# Altium PCB PCB1.PcbDoc (part 1 of 3)
Units mm, origin at the board's own origin, x right, y up, seen from the top; angles counter-clockwise.
Board outline 130 x 100 mm, 2 copper layers (Top Layer, Bottom Layer), stack 1.571 mm thick; 286 components, 215 nets, 1030 pads, 857 vias.
Unrouted connection lines stored in the file: 4.
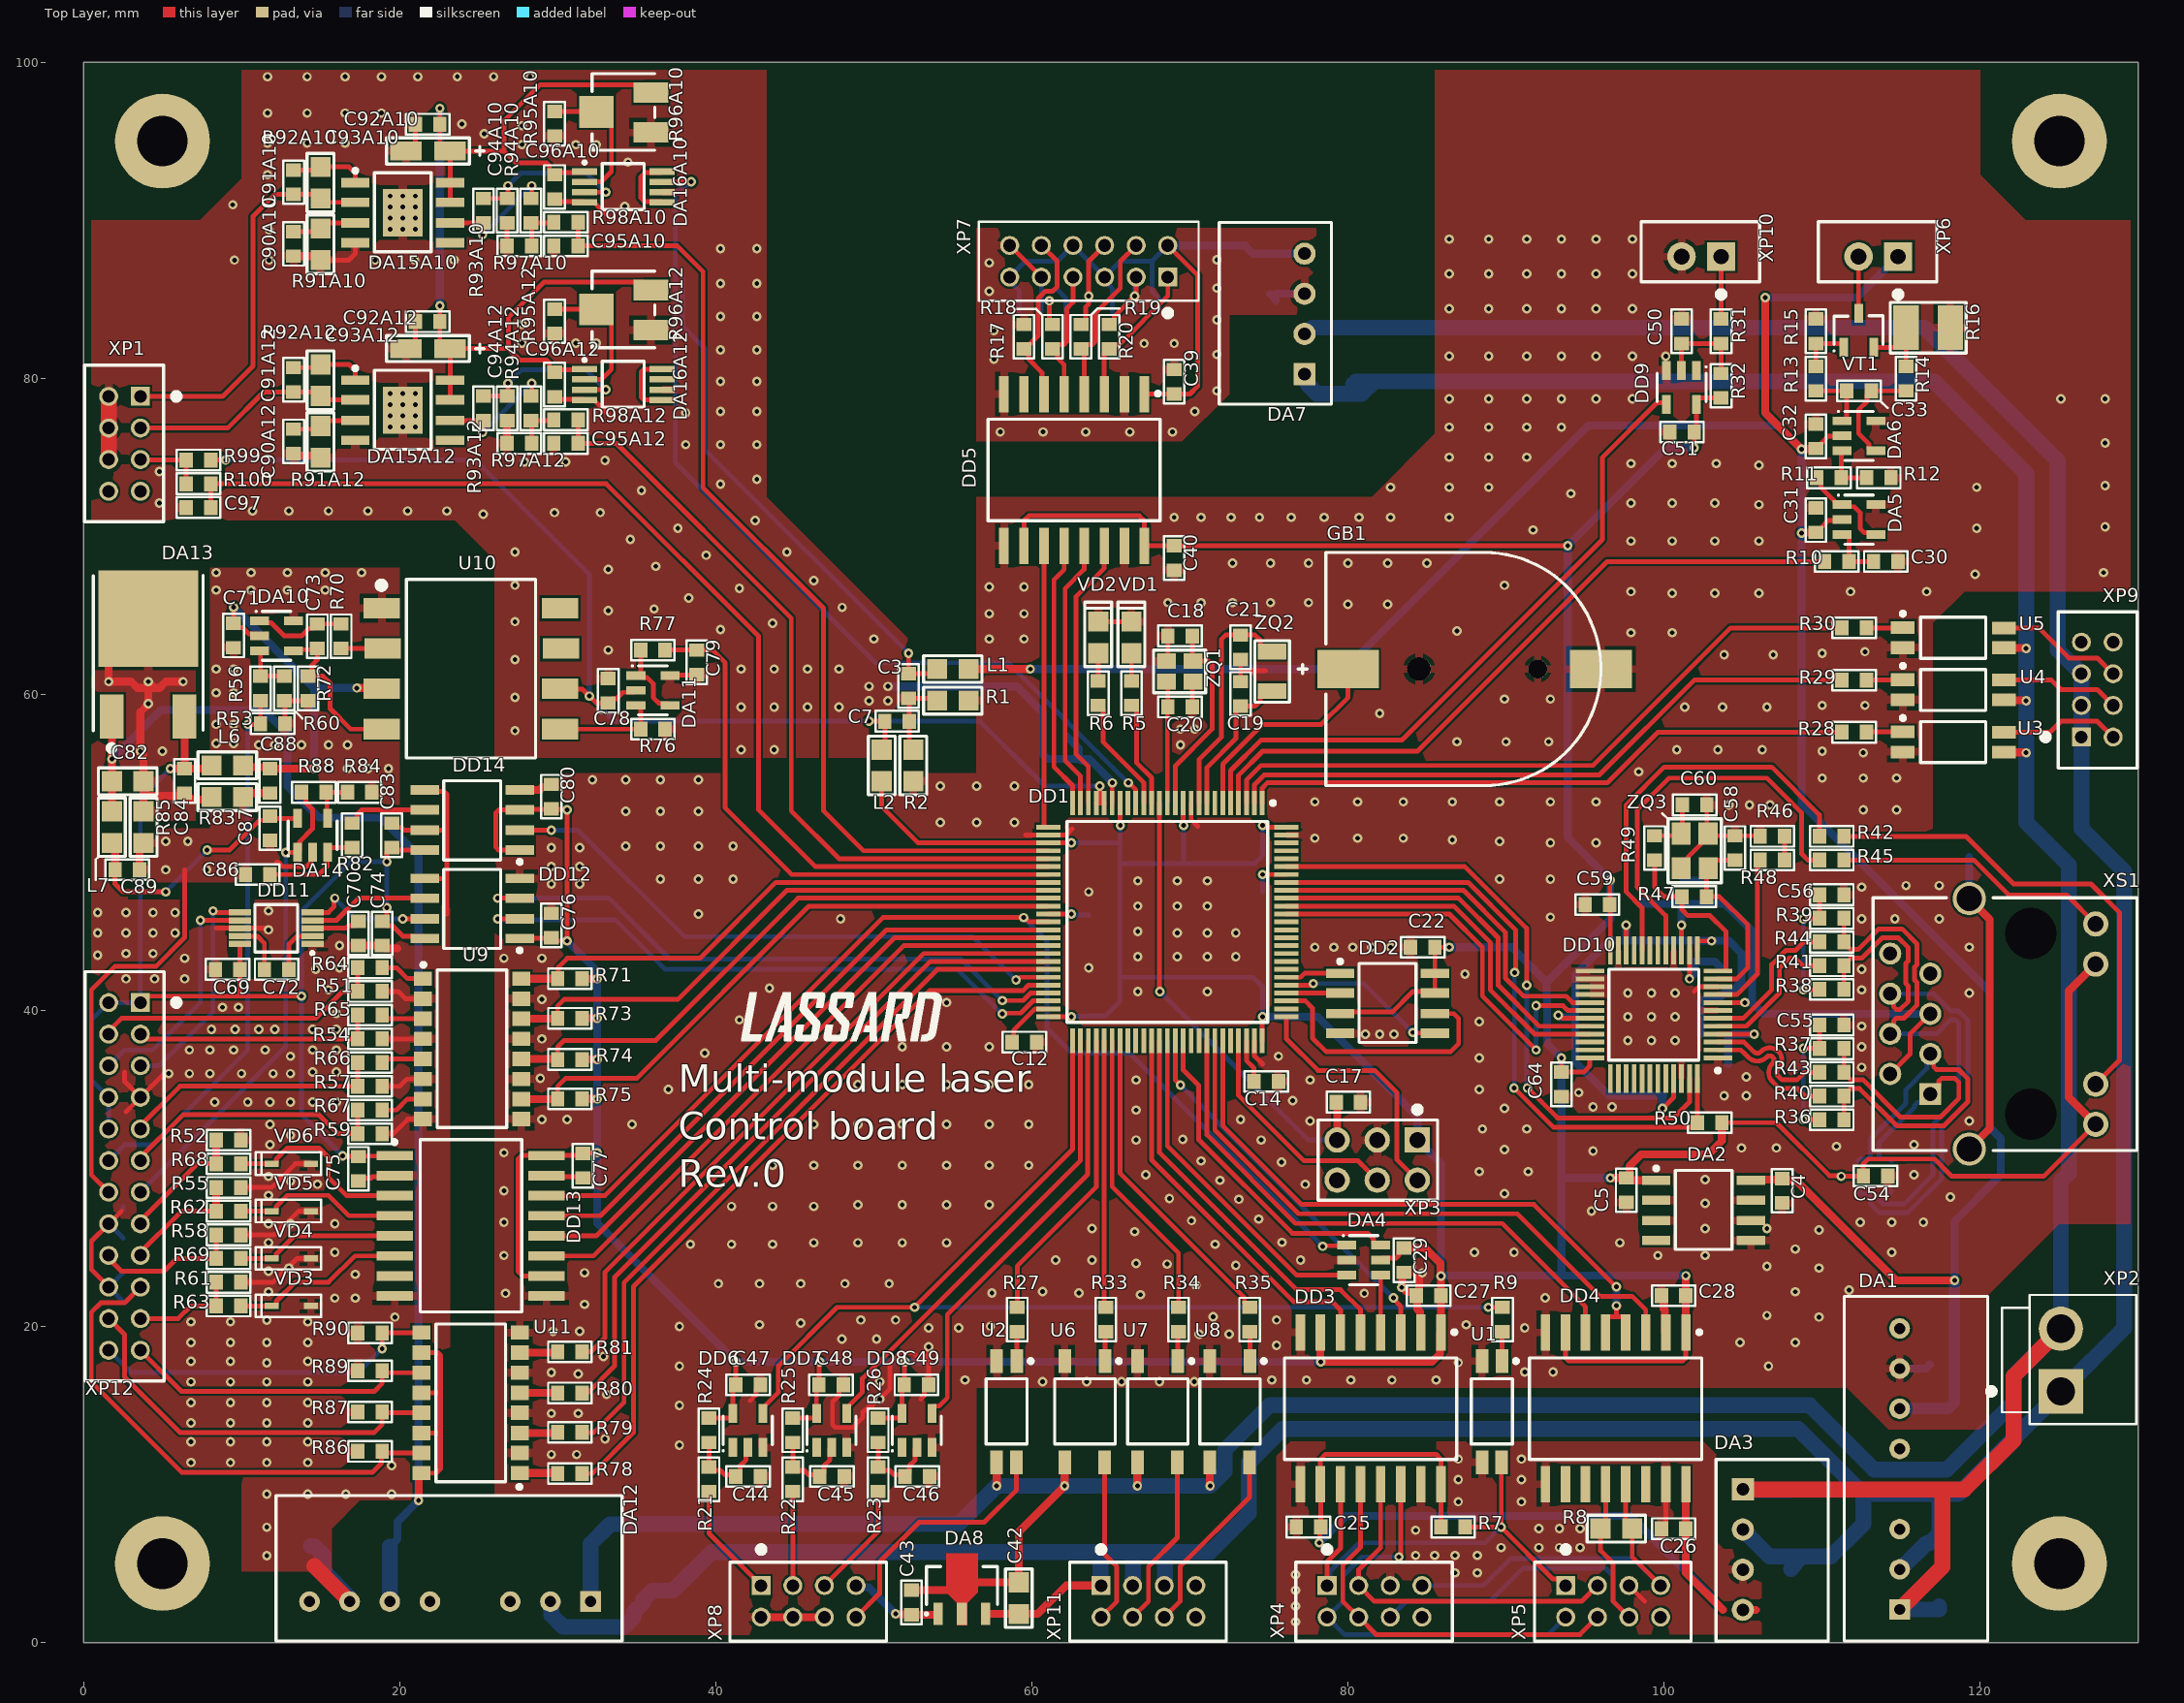
[diagram p0: Top Layer view]
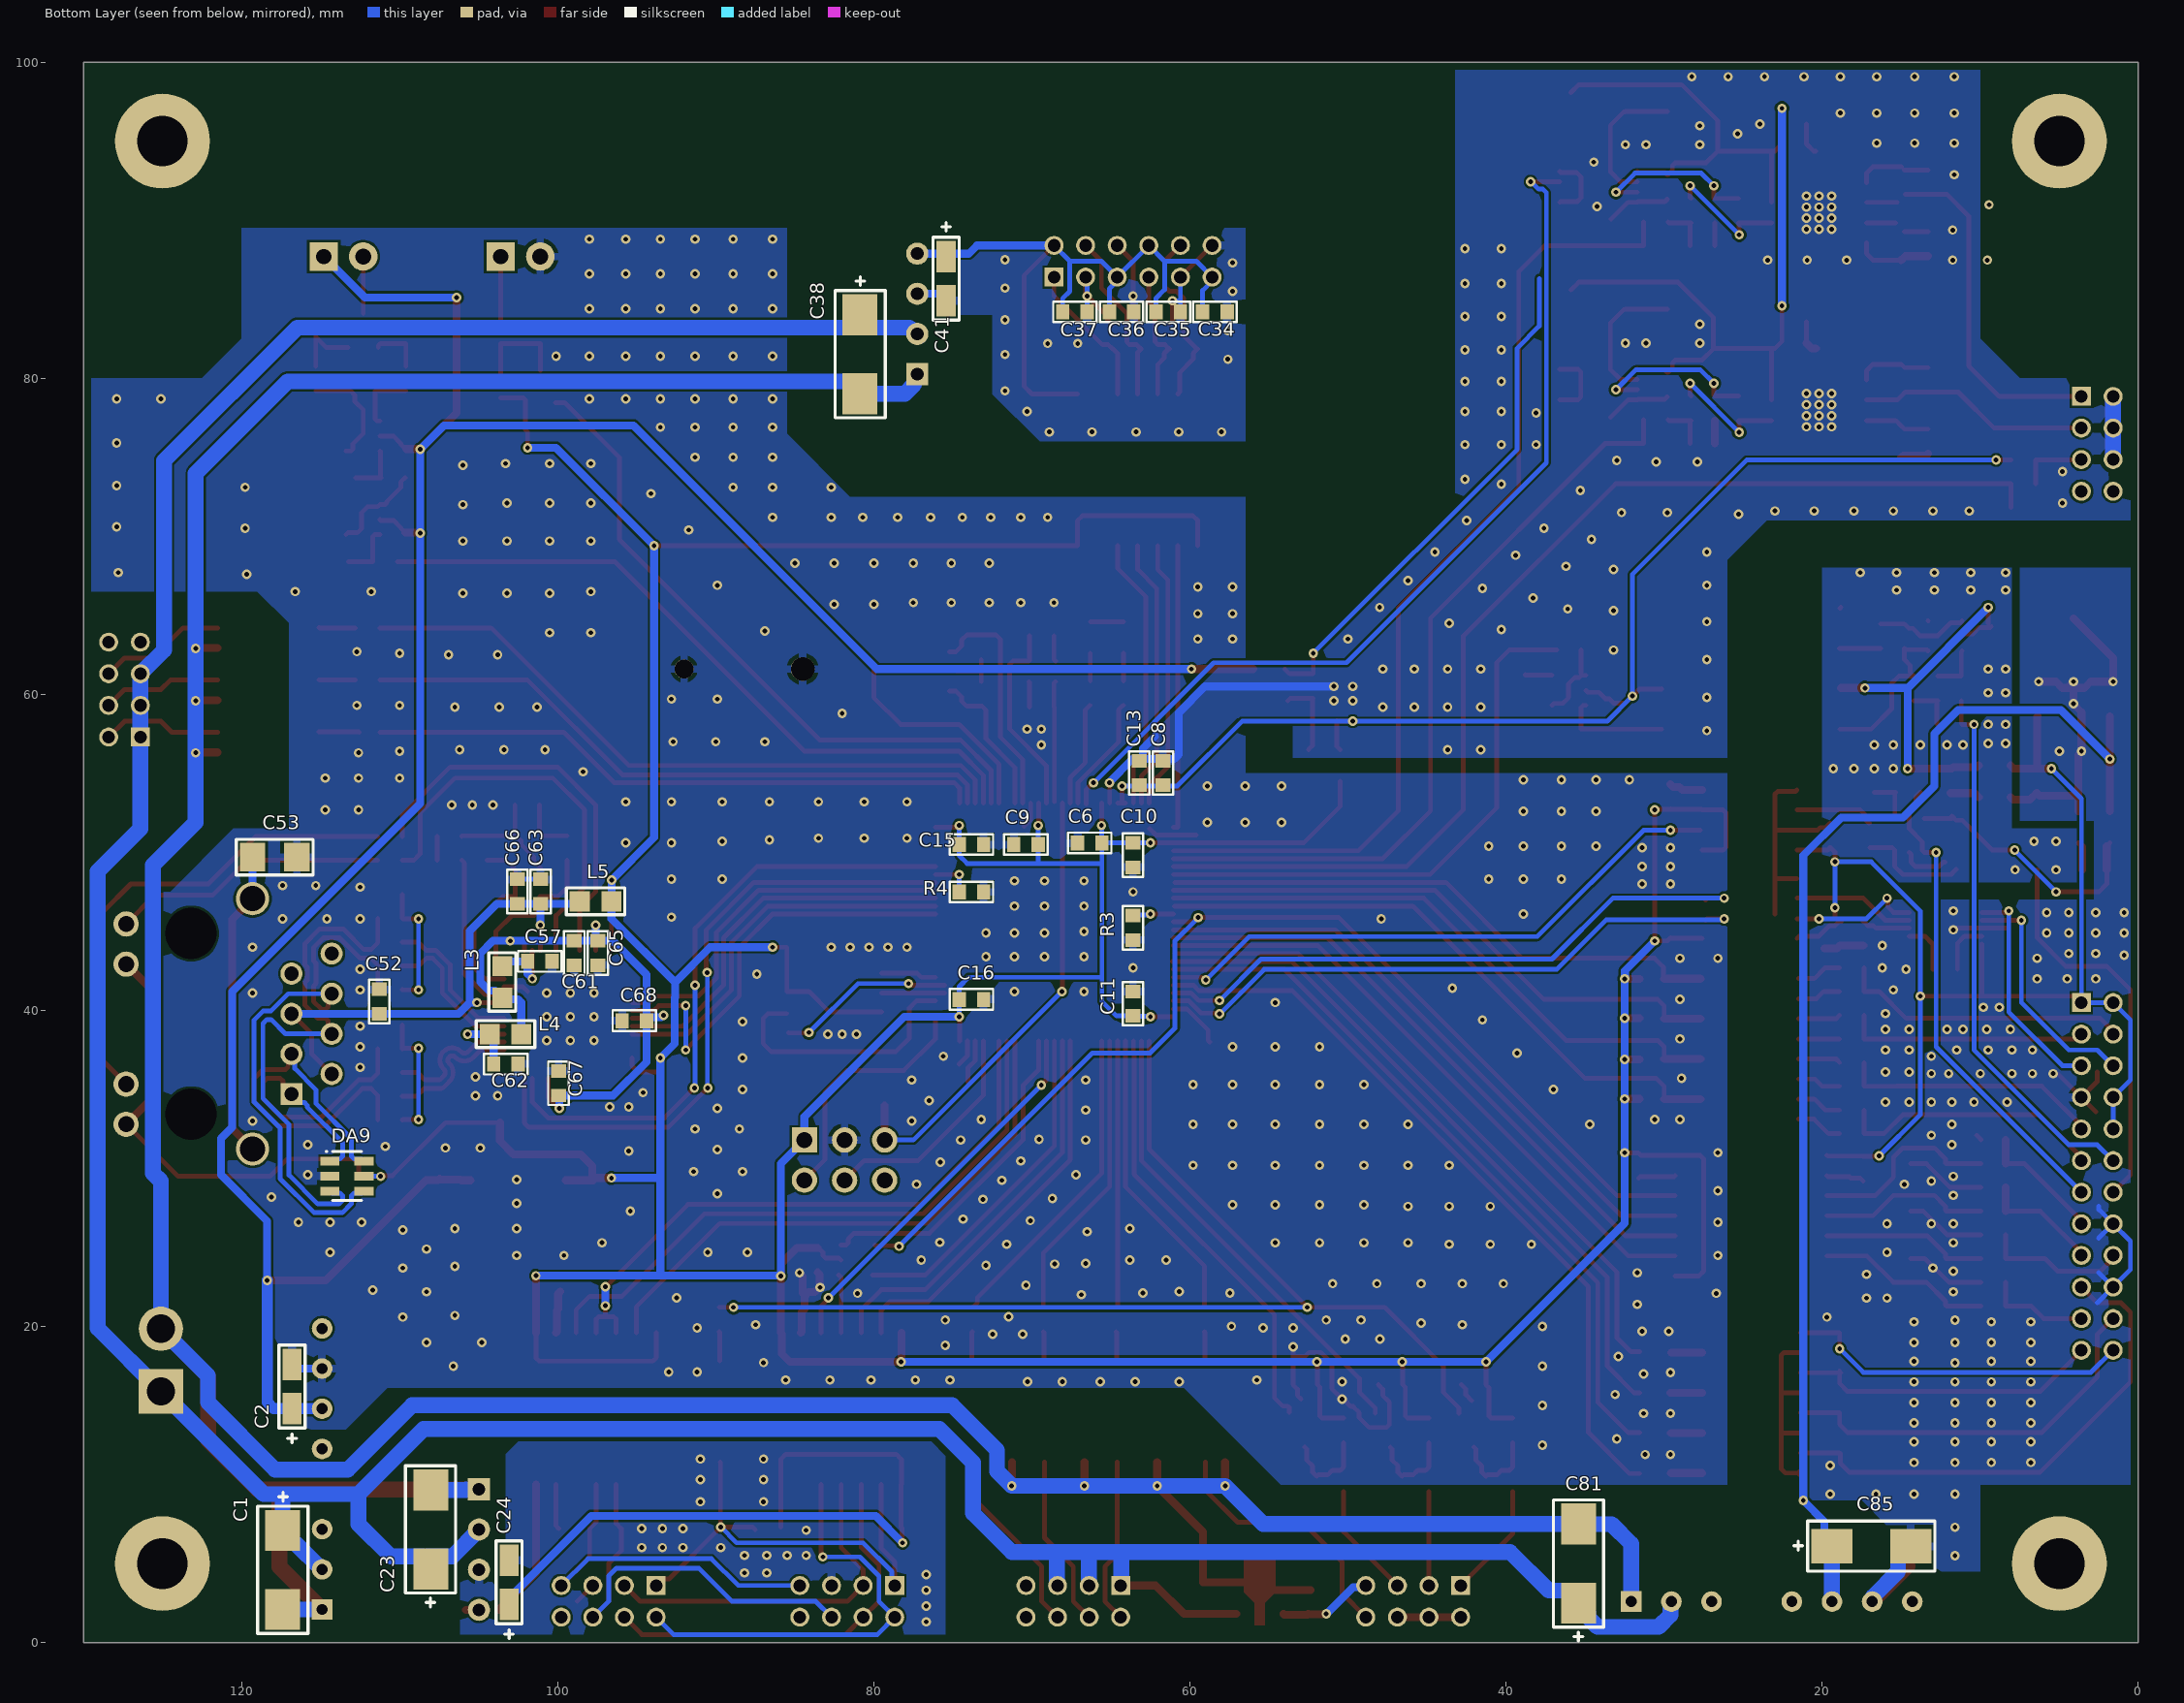
[diagram p1: Bottom Layer view, seen from below]
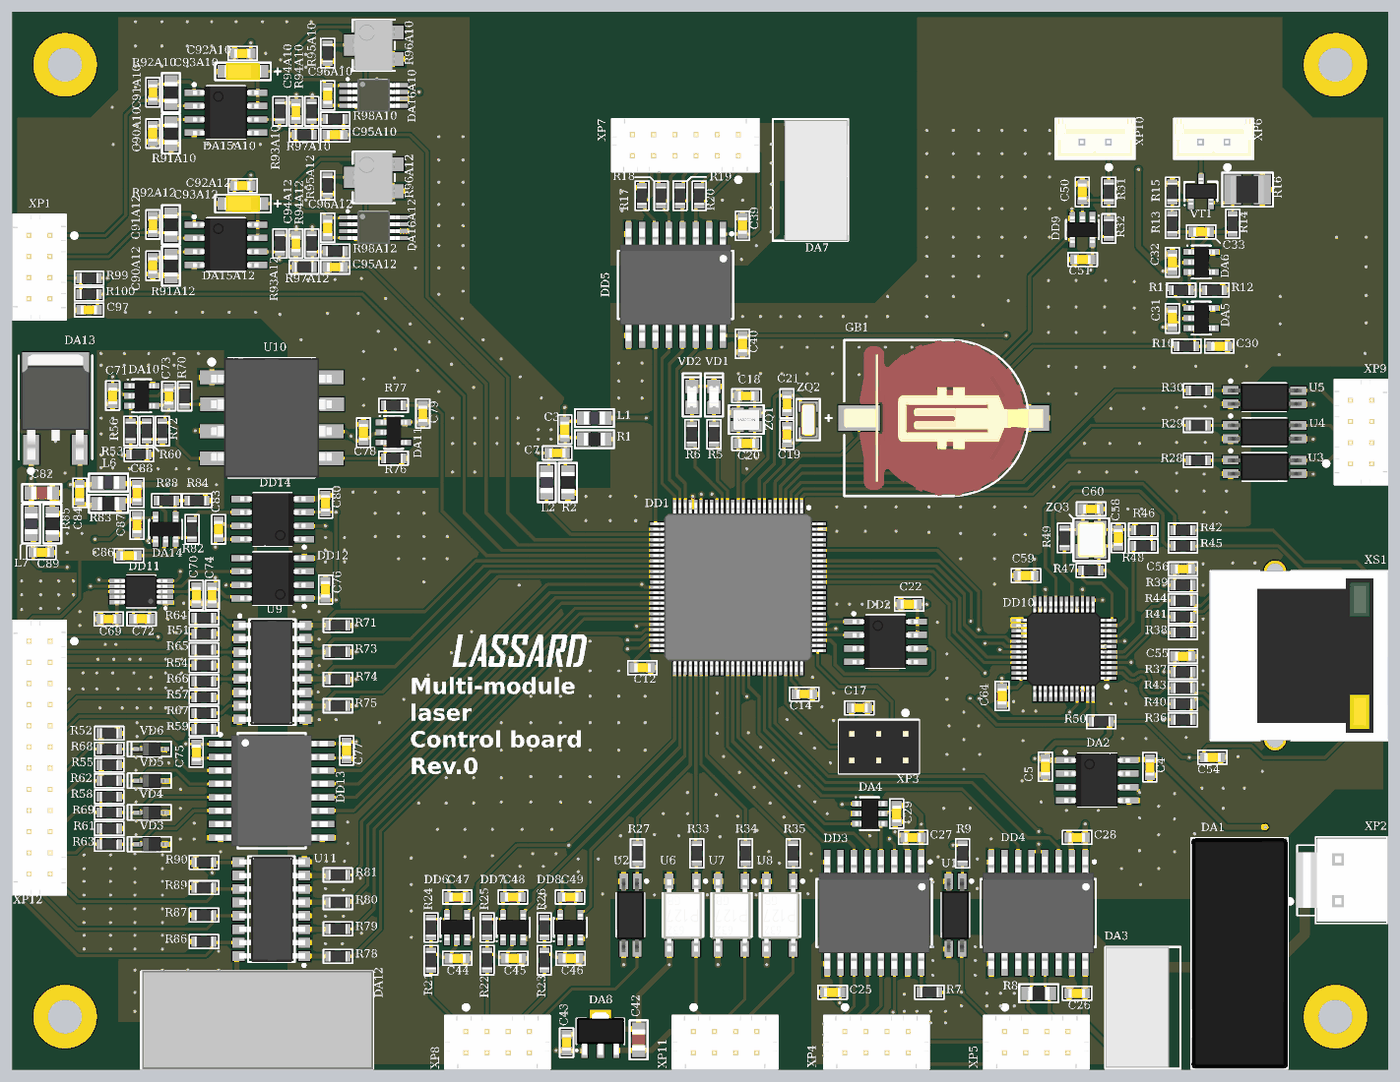
[diagram p4: 3D render of the assembled board from above, using the file's embedded part models]
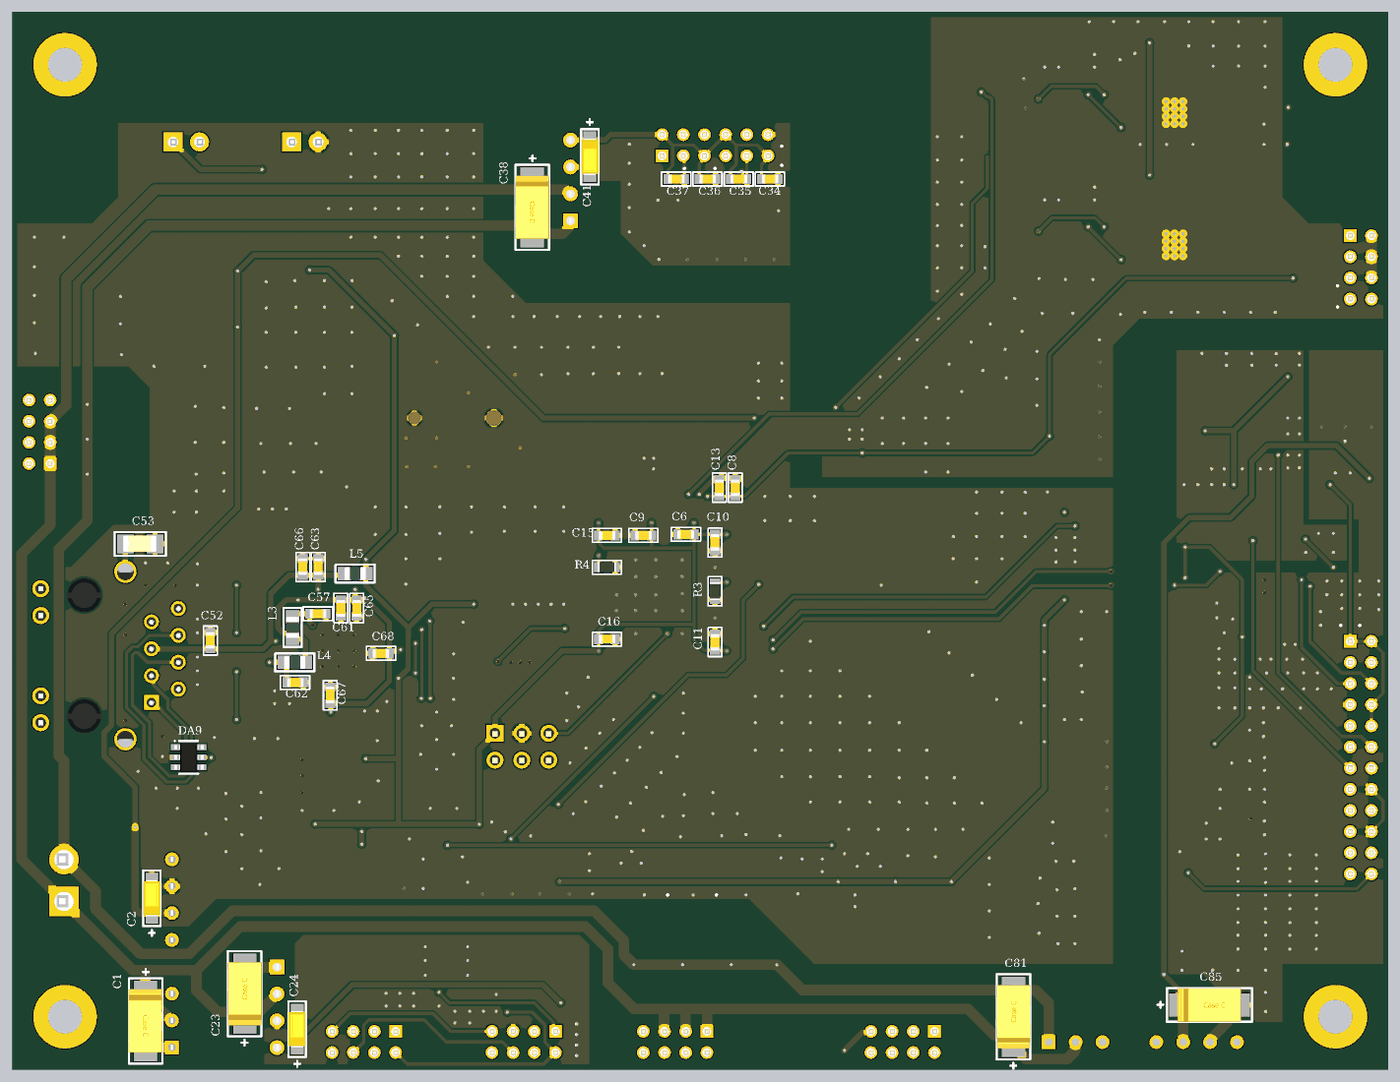
[diagram p5: 3D render of the assembled board from below, using the file's embedded part models]

## Layer stack, top to bottom
Top Solder: solder mask 0.0102, Solder Resist, Dk 3.5
Top Layer: signal copper 0.0356
Dielectric 1: dielectric 1.5, FR-4, Dk 4.8
Bottom Layer: signal copper 0.0356
Bottom Solder: solder mask 0.0102, Solder Resist, Dk 3.5

## Board outline
0,0 0,100 130,100 130,0

## Design rules (kind name [scope] priority, off if disabled: settings)
BoardOutlineClearance [(OnLayer('Bottom Layer') AND OnLayer('Top Layer'))] p1: gap=0.2 ignorepadtopadclearanceinfootprint=FALSE
Clearance [All] p1: gap=0.15 ignorepadtopadclearanceinfootprint=TRUE
DiffPairsRouting [All] p1: maxlimit=0.254 minlimit=0.2 mostfreqgap=0.254 toplayer_minwidth=0.3 toplayer_maxwidth=0.381 toplayer_prefwidth=0.381 bottomlayer_minwidth=0.3 bottomlayer_maxwidth=0.381 bottomlayer_prefwidth=0.381 maxuncoupledlength=12.7
Height [(OnLayer('Bottom Layer'))] p1: minheight=0 maxheight=3 prefheight=3
HoleSize [All] p1: absolutevalues=TRUE maxlimit=10 minlimit=0.2 maxpercent=80.000 minpercent=20.000
MinimumSolderMaskSliver [All] p1: minsoldermaskwidth=0.04
PlaneClearance [All] p1: clearance=0.5
PlaneConnect [All] p1: planeconnectstyle=Relief reliefexpansion=0.5 reliefentries=4 reliefconductorwidth=0.25 reliefairgap=0.25
PolygonConnect [All] p1: thpad.connectstyle=Relief thpad.reliefconductorwidth=0.5 thpad.reliefentries=4 thpad.polygonreliefangle="90 Angle" thpad.airgapwidth=0.25 smdpad.connectstyle=Relief smdpad.reliefconductorwidth=0.5 smdpad.reliefentries=4 smdpad.polygonreliefangle="90 Angle" smdpad.airgapwidth=0.25 via.connectstyle=Direct via.reliefconductorwidth=0.254 via.reliefentries=4 via.polygonreliefangle="90 Angle" via.airgapwidth=0.152
RoutingCorners [All] p1: cornerstyle=Round minsetback=0.254 maxsetback=2.54
RoutingVias [All] p1: holewidth=0.2 width=0.5 viastyle="Through Hole" minholewidth=0.2 minwidth=0.5 maxholewidth=1 maxwidth=1
SilkToSilkClearance [All] p1: silktosilkclearance=0.1
SilkToSolderMaskClearance [IsPad] p1: minsilkscreentomaskgap=0 clearancetoexposedcopper=TRUE
SolderMaskExpansion [All] p1: expansion=0.102 istentingtop=FALSE
Width [All] p1: maxlimit=1 minlimit=0.2 preferedwidth=0.3 minimp=50.000000 maximp=50.000000 favimp=50.000000
21 further rules are at their usual default settings.

## Classes and differential pairs
channel class Photodiode: A10 A12
component class A12: C90A12 C91A12 C92A12 C93A12 C94A12 C95A12 C96A12 DA15A12 DA16A12 R91A12 R92A12 R93A12 R94A12 R95A12 R96A12 R97A12 R98A12
component class A11: C97 R99 R100
component class A7: C50 C51 DD9 R31 R32 XP10
component class A9: C69 C70 C71 C72 C73 C74 C75 C76 C77 C78 C79 C80 C81 C82 C83 C84 C85 C86 C87 C88 C89 DA10 DA11 DA12 DA13 DA14 DD11 DD12 DD13 DD14 L6 L7 R51 R52 R53 R54 R55 R56 R57 R58 R59 R60 R61 R62 R63 R64 R65 R66 R67 R68 R69 R70 R71 R72 R73 R74 R75 R76 R77 R78 R79 R80 R81 R82 R83 R84 R85 R86 R87 R88 R89 R90 U9 U10 U11 VD3 VD4 VD5 VD6 XP12
component class A10: C90A10 C91A10 C92A10 C93A10 C94A10 C95A10 C96A10 DA15A10 DA16A10 R91A10 R92A10 R93A10 R94A10 R95A10 R96A10 R97A10 R98A10
differential pair class TD: TXO
differential pair class RD: RXI
component class Main: C1 C2 C3 C4 C5 C6 C7 C8 C9 C10 C11 C12 C13 C14 C15 C16 C17 C18 C19 C20 C21 C22 DA1 DA2 DD1 DD2 GB1 L1 L2 R1 R2 R3 R4 R5 R6 VD1 VD2 XP1 XP2 XP3 ZQ1 ZQ2
component class A8: C52 C53 C54 C55 C56 C57 C58 C59 C60 C61 C62 C63 C64 C65 C66 C67 C68 DA9 DD10 L3 L4 L5 R36 R37 R38 R39 R40 R41 R42 R43 R44 R45 R46 R47 R48 R49 R50 XS1 ZQ3
component class A1: C23 C24 C25 C26 C27 C28 C29 DA3 DA4 DD3 DD4 R7 R8 R9 U1 XP4 XP5
component class A6: R28 R29 R30 U3 U4 U5 XP9
component class A5: C30 C31 C32 C33 DA5 DA6 R10 R11 R12 R13 R14 R15 R16 VT1 XP6
component class A4: R33 R34 R35 U6 U7 U8 XP11
component class A3: C42 C43 C44 C45 C46 C47 C48 C49 DA8 DD6 DD7 DD8 R21 R22 R23 R24 R25 R26 R27 U2 XP8
component class A2: C34 C35 C36 C37 C38 C39 C40 C41 DA7 DD5 R17 R18 R19 R20 XP7
differential pair TXO: +TXO_P -TXO_N
differential pair TD: +TD_P -TD_N
differential pair RXI: +RXI_P -RXI_N
differential pair RD: +RD_P -RD_N

## Components (designator, comment, footprint, x,y, rotation, side; value= is the part's Value field where it differs from the comment)
C1 "10мкФх35B" CAP_C 117.4,7.1 r270 bottom
C2 "10мкФх10B" CAP_A 116.8,14.8 r90 bottom
C3 "0,1мкФ" CAP_0603 52.2,61.325 r270 top
C4 "0,1мкФ" CAP_0603 107.468,29.393 r270 top
C5 "2,2мкФ" CAP_0603 97.6,29.425 r270 top
C6 "0,1мкФ" CAP_0603 65.545,50.6 r0 bottom
C7 "0,1мкФ" CAP_0603 50.675,58.3 r0 top
C8 "0,1мкФ" CAP_0603 61.7,55.825 r270 bottom
C9 "0,1мкФ" CAP_0603 71.175,50.5 r180 bottom
C10 "0,1мкФ" CAP_0603 63.6,49.025 r90 bottom
C11 "0,1мкФ" CAP_0603 63.6,41.225 r270 bottom
C12 "2,2мкФ" CAP_0603 58.725,38 r0 top
C13 "0,1мкФ" CAP_0603 63.2,55.825 r270 bottom
C14 "2,2мкФ" CAP_0603 74.025,35.5 r0 top
C15 "0,1мкФ" CAP_0603 74.625,50.5 r180 bottom
C16 "0,1мкФ" CAP_0603 74.625,40.7 r180 bottom
C17 "0,1мкФ" CAP_0603 79.225,34.2 r0 top
C18 "8пФ" CAP_0603 70.175,63.7 r180 top
C19 "18пФ" CAP_0603 73.2,59.225 r90 top
C20 "8пФ" CAP_0603 68.575,59.2 r0 top
C21 "18пФ" CAP_0603 73.2,63.775 r270 top
C22 "0,1мкФ" CAP_0603 85.525,44 r180 top
C23 "10мкФх35B" CAP_C 108.025,4.665 r90 bottom
C24 "10мкФх10B" CAP_A 103.075,2.415 r90 bottom
C25 "0,1мкФ" CAP_0603 78.3,7.315 r180 top
C26 "0,1мкФ" CAP_0603 101.4,7.215 r180 top
C27 "0,1мкФ" CAP_0603 85.9,21.95 r180 top
C28 "0,1мкФ" CAP_0603 101.4,21.95 r180 top
C29 "0,1мкФ" CAP_0603 83.55,25 r270 top
C30 "1мкФ" CAP_0603 113.225,68.4 r0 top
C31 "0,1мкФ" CAP_0603 109.6,70.225 r90 top
C32 "0,1мкФ" CAP_0603 109.6,75.525 r90 top
C33 "100пФ" CAP_0603 111.525,79.2 r0 top
C34 "0,1мкФ" CAP_0603 59.225,84.2 r180 bottom
C35 "0,1мкФ" CAP_0603 62.175,84.2 r180 bottom
C36 "0,1мкФ" CAP_0603 65.125,84.2 r180 bottom
C37 "0,1мкФ" CAP_0603 68.075,84.2 r180 bottom
C38 "10мкФх35B" CAP_C 80.875,84.025 r270 bottom
C39 "0,1мкФ" CAP_0603 69,78.975 r90 top
C40 "0,1мкФ" CAP_0603 69,69.425 r270 top
C41 "10мкФх10B" CAP_A 75.425,87.7 r270 bottom
C42 "0,33мкФ" CAP_0805 59.175,3.815 r270 top
C43 "0,1мкФ" CAP_0603 52.375,1.74 r90 top
C44 "1мкФ" CAP_0603 41.25,10.515 r0 top
C45 "1мкФ" CAP_0603 46.55,10.515 r0 top
C46 "1мкФ" CAP_0603 51.95,10.515 r0 top
C47 "0,1мкФ" CAP_0603 41.25,16.315 r0 top
C48 "0,1мкФ" CAP_0603 46.5,16.315 r0 top
C49 "0,1мкФ" CAP_0603 51.9,16.315 r0 top
C50 "1мкФ" CAP_0603 101.1,82.175 r90 top
C51 "0,1мкФ" CAP_0603 101.925,76.6 r180 top
C52 "0,1мкФ" CAP_0603 111.279,39.762 r90 bottom
C53 "1нФх2кВ" CAP_1206 119.3,49.7 r180 bottom
C54 "0,1мкФ" CAP_0603 112.575,29.525 r0 top
C55 "0,1мкФ" CAP_0603 109.8,39.078 r0 top
C56 "0,1мкФ" CAP_0603 109.8,47.325 r0 top
C57 "0,1мкФ" CAP_0603 101.925,43.1 r180 bottom
C58 "8пФ" CAP_0603 104.475,49.475 r90 top
C59 "0,1мкФ" CAP_0603 96.575,46.7 r180 top
C60 "8пФ" CAP_0603 101.125,53 r0 top
C61 "0,1мкФ" CAP_0603 98.95,44.435 r270 bottom
C62 "0,1мкФ" CAP_0603 104.075,36.6 r180 bottom
C63 "0,1мкФ" CAP_0603 101.075,46.725 r90 bottom
C64 "0,1мкФ" CAP_0603 93.5,36.125 r270 top
C65 "0,1мкФ" CAP_0603 97.45,44.435 r270 bottom
C66 "0,1мкФ" CAP_0603 102.542,46.725 r90 bottom
C67 "0,1мкФ" CAP_0603 99.95,34.595 r90 bottom
C68 "0,1мкФ" CAP_0603 94.345,39.35 r0 bottom
C69 "0,1мкФ" CAP_0603 9.925,42.6 r180 top
C70 "0,1мкФ" CAP_0603 17.401,45.676 r270 top
C71 "0,1мкФ" CAP_0603 9.5,64.525 r270 top
C72 "0,1мкФ" CAP_0603 11.425,42.6 r0 top
C73 "100пФ" CAP_0603 14.8,64.475 r270 top
C74 "0,1мкФ" CAP_0603 18.9,45.675 r270 top
C75 "0,1мкФ" CAP_0603 17.4,30.775 r270 top
C76 "0,1мкФ" CAP_0603 29.6,44.575 r90 top
C77 "0,1мкФ" CAP_0603 31.6,30.975 r270 top
C78 "0,1мкФ" CAP_0603 33.2,59.425 r90 top
C79 "0,1мкФ" CAP_0603 38.8,62.825 r270 top
C80 "0,1мкФ" CAP_0603 29.6,52.725 r90 top
C81 "10мкФх35B" CAP_C 35.4,2.5 r90 bottom
C82 "0,33мкФ" CAP_0805 3.8,54.5 r180 top
C83 "0,1мкФ" CAP_0603 19.5,50.275 r90 top
C84 "0,1мкФ" CAP_0603 6.4,55.325 r270 top
C85 "10мкФх35B" CAP_C 19.4,6.1 r180 bottom
C86 "1мкФ" CAP_0603 11.825,48.6 r180 top
C87 "0,1мкФ" CAP_0603 11.8,52.325 r270 top
C88 "0,1мкФ" CAP_0603 11.8,55.325 r270 top
C89 "0,1мкФ" CAP_0603 1.975,48.9 r0 top
C90A10 "0,1мкФ" CAP_0603 13.3,87.7 r90 top (schematic designator C90)
C90A12 "0,1мкФ" CAP_0603 13.3,75.2 r90 top (schematic designator C90)
C91A10 "10пФ" CAP_0603 13.3,93.2 r270 top (schematic designator C91)
C91A12 "10пФ" CAP_0603 13.3,80.7 r270 top (schematic designator C91)
C92A10 "0,1мкФ" CAP_0603 22.575,96.075 r180 top (schematic designator C92)
C92A12 "0,1мкФ" CAP_0603 22.575,83.575 r180 top (schematic designator C92)
C93A10 "10мкФх10B" CAP_A 23.2,94.375 r180 top (schematic designator C93)
C93A12 "10мкФх10B" CAP_A 23.2,81.875 r180 top (schematic designator C93)
C94A10 "10пФ" CAP_0603 26.8,91.4 r270 top (schematic designator C94)
C94A12 "10пФ" CAP_0603 26.8,78.9 r270 top (schematic designator C94)
C95A10 "0,1мкФ" CAP_0603 31.325,88.375 r180 top (schematic designator C95)
C95A12 "0,1мкФ" CAP_0603 31.325,75.875 r180 top (schematic designator C95)
C96A10 "0,1мкФ" CAP_0603 29.8,92.9 r270 top (schematic designator C96)
C96A12 "0,1мкФ" CAP_0603 29.8,80.4 r270 top (schematic designator C96)
C97 "0,1мкФ" CAP_0603 8.075,71.825 r180 top
DA1 "TMR 3-2411" "TMR3 (SIP-8)" 114.9,2.1 r90 top
DA2 "KF33BD-TR" SOIC-8 99.5,29.25 r0 top
DA3 "TME 2405S" "TME (SIP-4)" 104.975,9.695 r270 top
DA4 "SN74LVC1G3157DBV" SOT-23-6 79.925,25.15 r0 top
DA5 "LMC7101BIM5" SOT-23-5 111.25,72 r0 top
DA6 "LMC7101BIM5" SOT-23-5 111.25,77.3 r0 top
DA7 "TME 2405S" "TME (SIP-4)" 77.25,80.26 r90 top
DA8 "L78L12ABUTR" SOT-89 54.075,1.815 r0 top
DA9 "TPD4S009DBVR" SOT-23-6 114.4,30.475 r180 bottom
DA10 "LMC7101BIM5" SOT-23-5 11.15,64.65 r0 top
DA11 "LMC7101BIM5" SOT-23-5 34.95,61.2 r0 top
DA12 "TMR 4-2415" "TMR4 (SIP-8)" 32.08,2.6 r180 top
DA13 "L78M05CDT-TR" TO-252 1.8,58.6 r0 top
DA14 "LM7301IM5X/NOPB" SOT-23-5 13.55,50 r90 top
DA15A10 "ADA4817-1ARDZ" "SOIC-8 EPAD" 17.2,92.375 r0 top (schematic designator DA15)
DA15A12 "ADA4817-1ARDZ" "SOIC-8 EPAD" 17.2,79.875 r0 top (schematic designator DA15)
DA16A10 "AD8611ARM-REEL" MSOP-8 31.7,93.075 r0 top (schematic designator DA16)
DA16A12 "AD8611ARM-REEL" MSOP-8 31.7,80.575 r0 top (schematic designator DA16)
DD1 "STM32F405VGT6" LQFP-100 74.6,53.125 r270 top
DD2 "W25Q16JVSNIQ" SOIC-8 79.5,42.35 r0 top
DD3 "ADUM1401CRW" SOIC-16W 85.875,19.615 r270 top
DD4 "ADM2483BRW" SOIC-16W 101.375,19.615 r270 top
DD5 "ADUM1400CRW" SOIC-16W 67.12,79 r270 top
DD6 "SN74LVC1G17DBV" SOT-23-5 41.075,12.365 r90 top
DD7 "SN74LVC1G17DBV" SOT-23-5 46.375,12.365 r90 top
DD8 "SN74LVC1G17DBV" SOT-23-5 51.775,12.365 r90 top
DD9 "SN74LVC1G17DBV" SOT-23-5 102.05,80.5 r270 top
DD10 "W5100S-L" LQFP-48 103.4,37 r180 top
DD11 "ADM101EARM" MSOP-10 14.475,44.2 r180 top
DD12 "ADUM1201CR" SOIC-8 27.6,44.55 r180 top
DD13 "ADUM1400CRW" SOIC-16W 19.7,30.82 r0 top
DD14 "ADUM1100BR" SOIC-8 27.6,50.15 r180 top
GB1 "DS1092-12-N8S" DS1092-12-N8S 96,61.6 r180 top
L1 "BLM21PG221SN1D" IND_0805 56,61.6 r180 top
L2 "BLM21PG221SN1D" IND_0805 50.5,54.5 r90 top
L3 "BLM21PG221SN1D" IND_0805 103.5,42.8 r270 bottom
L4 "BLM21PG221SN1D" IND_0805 102.3,38.5 r0 bottom
L5 "BLM21PG221SN1D" IND_0805 96.6,46.9 r0 bottom
L6 "BLM21PG221SN1D" IND_0805 8.1,55.5 r0 top
L7 "BLM21PG221SN1D" IND_0805 1.8,52.6 r270 top
R1 "0" RES_0805 56,59.6 r180 top
R2 "0" RES_0805 52.5,54.5 r90 top
R3 "10к" RES_0603 63.6,46.025 r270 bottom
R4 "10к" RES_0603 74.625,47.5 r180 bottom
R5 "200" RES_0603 66.3,59.275 r90 top
R6 "200" RES_0603 64.2,59.275 r90 top
R7 "10к" RES_0603 85.85,7.315 r0 top
R8 "120" RES_0805 95.975,7.215 r0 top
R9 "200" RES_0603 89.775,21.24 r270 top
R10 "10к" RES_0603 110.125,68.4 r0 top
R11 "12к" RES_0603 109.625,73.7 r0 top
R12 "10к" RES_0603 112.775,73.7 r0 top
R13 "200" RES_0603 109.6,79.175 r90 top
R14 "10к" RES_0603 115.3,79.175 r90 top
R15 "10к" RES_0603 109.6,83.775 r270 top
R16 "10" RES_1210 118.075,83.225 r180 top
R17 "10к" RES_0603 59.5,81.825 r90 top
R18 "10к" RES_0603 61.3,81.825 r90 top
R19 "10к" RES_0603 63.1,81.825 r90 top
R20 "10к" RES_0603 64.9,81.825 r90 top
R21 "1к" RES_0603 39.575,9.54 r90 top
R22 "1к" RES_0603 44.875,9.54 r90 top
R23 "1к" RES_0603 50.275,9.54 r90 top
R24 "10к" RES_0603 39.575,12.64 r90 top
R25 "10к" RES_0603 44.875,12.64 r90 top
R26 "10к" RES_0603 50.275,12.64 r90 top
R27 "200" RES_0603 59.075,19.64 r90 top
R28 "200" RES_0603 112.825,57.6 r180 top
R29 "200" RES_0603 112.825,60.9 r180 top
R30 "200" RES_0603 112.825,64.2 r180 top
R31 "1к" RES_0603 103.6,83.775 r270 top
R32 "10к" RES_0603 103.6,80.325 r270 top
R33 "200" RES_0603 64.675,19.64 r90 top
R34 "200" RES_0603 69.275,19.64 r90 top
R35 "200" RES_0603 73.775,19.64 r90 top
R36 "49,9" RES_0603 111.4,33.078 r180 top
R37 "49,9" RES_0603 111.4,37.578 r180 top
R38 "49,9" RES_0603 111.4,41.325 r180 top
R39 "49,9" RES_0603 111.4,45.825 r180 top
R40 "3,3" RES_0603 109.8,34.577 r0 top
R41 "3,3" RES_0603 109.8,42.825 r0 top
R42 "1к" RES_0603 111.4,51.012 r180 top
R43 "3,3" RES_0603 109.8,36.078 r0 top
R44 "3,3" RES_0603 109.8,44.325 r0 top
R45 "1к" RES_0603 111.4,49.512 r180 top
R46 "300" RES_0603 106.05,51.012 r0 top
R47 "1М" RES_0603 102.7,47.2 r180 top
R48 "12к" RES_0603 107.65,49.512 r180 top
R49 "0" RES_0603 99.4,49.475 r90 top
R50 "10к" RES_0603 102.075,32.9 r0 top
R51 "10к" RES_0603 18.925,41.2 r180 top
R52 "10к" RES_0603 9.975,31.8 r180 top
R53 "10к" RES_0603 11.175,58.15 r0 top
R54 "10к" RES_0603 18.925,38.2 r180 top
R55 "10к" RES_0603 9.975,28.8 r180 top
R56 "20к" RES_0603 11.2,59.575 r90 top
R57 "10к" RES_0603 18.925,35.2 r180 top
R58 "10к" RES_0603 9.975,25.8 r180 top
R59 "10к" RES_0603 18.925,32.2 r180 top
R60 "10к" RES_0603 12.7,61.175 r270 top
R61 "10к" RES_0603 9.975,22.8 r180 top
R62 "10к" RES_0603 8.375,27.3 r0 top
R63 "10к" RES_0603 8.375,21.3 r0 top
R64 "390" RES_0603 17.325,42.7 r0 top
R65 "390" RES_0603 17.325,39.7 r0 top
R66 "390" RES_0603 17.325,36.7 r0 top
R67 "390" RES_0603 17.325,33.7 r0 top
R68 "10к" RES_0603 8.375,30.3 r0 top
R69 "10к" RES_0603 8.375,24.3 r0 top
R70 "330" RES_0603 16.3,64.475 r270 top
R71 "10к" RES_0603 31.575,42 r180 top
R72 "150к" RES_0603 14.2,61.175 r270 top
R73 "10к" RES_0603 31.575,39.5 r180 top
R74 "10к" RES_0603 31.575,36.9 r180 top
R75 "10к" RES_0603 31.575,34.4 r180 top
R76 "150к" RES_0603 35.225,57.8 r0 top
R77 "10к" RES_0603 35.225,62.8 r0 top
R78 "200" RES_0603 29.975,10.7 r0 top
R79 "200" RES_0603 29.975,13.3 r0 top
R80 "200" RES_0603 29.975,15.8 r0 top
R81 "200" RES_0603 29.975,18.4 r0 top
R82 "10к" RES_0603 17,51.875 r270 top
R83 "0" RES_0805 8.1,53.5 r0 top
R84 "10к" RES_0603 18.275,53.8 r180 top
R85 "0" RES_0805 3.8,52.6 r270 top
R86 "10к" RES_0603 17.325,12.1 r0 top
R87 "10к" RES_0603 17.325,14.6 r0 top
R88 "6,04к" RES_0603 15.375,53.8 r180 top
R89 "10к" RES_0603 17.325,17.2 r0 top
R90 "10к" RES_0603 17.325,19.6 r0 top
R91A10 "1М" RES_0805 15,89.475 r270 top (schematic designator R91)
R91A12 "1М" RES_0805 15,76.975 r270 top (schematic designator R91)
R92A10 "1М" RES_0805 15,93.375 r270 top (schematic designator R92)
R92A12 "1М" RES_0805 15,80.875 r270 top (schematic designator R92)
R93A10 "10к" RES_0603 25.3,89.8 r90 top (schematic designator R93)
R93A12 "10к" RES_0603 25.3,77.3 r90 top (schematic designator R93)
R94A10 "5,1к" RES_0603 28.3,91.4 r270 top (schematic designator R94)
R94A12 "5,1к" RES_0603 28.3,78.9 r270 top (schematic designator R94)
R95A10 "10к" RES_0603 29.8,95.3 r90 top (schematic designator R95)
R95A12 "10к" RES_0603 29.8,82.8 r90 top (schematic designator R95)
R96A10 "200к" 3224W 35.9,95.55 r0 top (schematic designator R96)
R96A12 "200к" 3224W 35.9,83.05 r0 top (schematic designator R96)
R97A10 "10к" RES_0603 28.375,88.375 r180 top (schematic designator R97)
R97A12 "10к" RES_0603 28.375,75.875 r180 top (schematic designator R97)
R98A10 "10к" RES_0603 29.725,89.875 r0 top (schematic designator R98)
R98A12 "10к" RES_0603 29.725,77.375 r0 top (schematic designator R98)
R99 "10к" RES_0603 8.075,74.825 r180 top
R100 "10к" RES_0603 6.475,73.325 r0 top
U1 "TLP291(GB-TP,SE" 11-3C1 89.75,17.815 r270 top
U2 "TLP291(GB-TP,SE" 11-3C1 59.05,17.815 r270 top
U3 "TLP291(GB-TP,SE" 11-3C1 115.1,57.625 r0 top
U4 "TLP291(GB-TP,SE" 11-3C1 115.1,60.925 r0 top
U5 "TLP291(GB-TP,SE" 11-3C1 115.1,64.225 r0 top
U6 "TLP127" 11-4C1 64.625,17.815 r270 top
U7 "TLP127" 11-4C1 69.225,17.815 r270 top
U8 "TLP127" 11-4C1 73.8,17.815 r270 top
U9 "TLP281-4" SOP-16 21.48,42.01 r0 top
U10 "HCNR-200-500E" HCNR200 18.875,65.45 r0 top
U11 "TLP281-4" SOP-16 27.6,10.73 r180 top
VD1 "KP-2012MGC" LED_0805 66.3,62.6 r90 top
VD2 "KP-2012EC" LED_0805 64.2,62.6 r90 top
VD3 "BZX384-C5V1" SOD-323 11.925,21.3 r0 top
VD4 "BZX384-C5V1" SOD-323 11.925,24.3 r0 top
VD5 "BZX384-C5V1" SOD-323 11.925,27.3 r0 top
VD6 "BZX384-C5V1" SOD-323 11.925,30.3 r0 top
VT1 "AO3400A" SOT-23-3 111.35,81.95 r90 top
XP1 "B8B-PHDSS" B8B-PHDSS 3.6,78.85 r90 top
XP2 "B2P-VH" B2P-VH 125.1,15.9 r90 top
XP3 "PLD-6" PLD-6 84.39,31.8 r180 top
XP4 "B8B-PHDSS" B8B-PHDSS 78.675,3.615 r180 top
XP5 "B8B-PHDSS" B8B-PHDSS 93.775,3.615 r180 top
XP6 "B2B-EH-A" B2B-EH-A 114.8,87.7 r180 top
XP7 "B12B-PHDSS" B12B-PHDSS 68.6,86.4 r0 top
XP8 "B8B-PHDSS" B8B-PHDSS 42.875,3.615 r180 top
XP9 "B8B-PHDSS" B8B-PHDSS 126.4,57.3 r270 top
XP10 "B2B-EH-A" B2B-EH-A 103.6,87.7 r180 top
XP11 "B8B-PHDSS" B8B-PHDSS 64.375,3.615 r180 top
XP12 "B24B-PHDSS" B24B-PHDSS 3.6,40.5 r90 top
XS1 "LPJD0012BENL" LPJD0012BENL 116.84,34.707 r90 top
ZQ1 "16МГц" NX2520SA 70.2,62.1 r180 top
ZQ2 "32,768кГц" NX3215SA 75.2,60.2 r90 top
ZQ3 "25МГц" 7M 102.8,49 r90 top

## Footprints (in the part's own frame and the unit in brackets; to place one, negate y for a bottom-side part, rotate by r counter-clockwise, add the part's x,y. Pads: shape width x height; smd on the part's side, far side on the other; paste and mask are expansions set on the pad)
7M [mm]
  rect 1.4x1.2 smd: 1(0,0) 2(2.2,0.025) 3(2.2,1.725) 4(0,1.725)
  silkscreen extent -0.92,-0.82 3.13,2.55, body extent -0.55,-0.45 2.75,2.15, height 0.8
11-3C1 [mm]
  rect 1.5x0.8 smd: 1(0,0) 2(0,-1.275) 3(6.4,-1.275) 4(6.4,-0.025)
  silkscreen extent -0.12,-1.95 5.25,1, body extent -0.28,-1.95 6.73,0.65, height 2.2
11-4C1 [mm]
  rect 1.5x0.8 smd: 1(0,0) 3(0,-2.55) 4(6.4,-2.55) 6(6.4,-0.025)
  silkscreen extent -0.12,-3.17 5.25,1, body extent -0.15,-3.07 6.65,0.52, height 2.55
3224W [mm]
  rect 2.2x1.3 smd: 1(0,0) 3(0,2.525)
  rect 2.2x2 smd: 2(-3.45,1.3)
  silkscreen extent -3.72,-1.12 0.25,3.72, body extent -3.72,-1.12 0.23,3.71, height 5.29
B2B-EH-A [mm]
  rect 1.8x1.8 hole 0.965: 1(0,0)
  round 1.8 hole 1: 2(2.5,0)
  silkscreen extent -2.45,-2.2 5.05,2.6, body extent -2.45,-2.2 5.05,1.6, height 6
B2P-VH [mm]
  rect 2.8x2.8 hole 1.8: 1(0,0)
  round 2.8 hole 1.8: 2(3.96,0)
  silkscreen extent -2.07,-4.78 6.1,4.6, body extent -1.93,-4.75 5.93,3.75, height 10.9
B8B-PHDSS [mm]
  rect 1.2x1.2 hole 0.8: 1(0,0)
  round 1.2 hole 0.8: 2(0,2) 3(-2,0) 4(-2,2) 5(-4,0) 6(-4,2) 7(-6,0) 8(-6,2)
  silkscreen extent -7.93,-2.47 1.97,3.52, body extent -7.93,-1.48 1.97,3.52, height 6.5
B12B-PHDSS [mm]
  rect 1.2x1.2 hole 0.8: 1(0,0)
  round 1.2 hole 0.8: 2(0,2) 3(-2,0) 4(-2,2) 5(-4,0) 6(-4,2) 7(-6,0) 8(-6,2) 9(-8,0) 10(-8,2) 11(-10,0) 12(-10,2)
  silkscreen extent -11.95,-2.47 1.95,3.5, body extent -11.95,-1.5 1.95,3.5, height 6.5
B24B-PHDSS [mm]
  rect 1.2x1.2 hole 0.8: 1(0,0)
  round 1.2 hole 0.8: 2(0,2) 3(-2,0) 4(-2,2) 5(-4,0) 6(-4,2) 7(-6,0) 8(-6,2) 9(-8,0) 10(-8,2) 11(-10,0) 12(-10,2) 13(-12,0) 14(-12,2) 15(-14,0) 16(-14,2) 17(-16,0) 18(-16,2) 19(-18,0) 20(-18,2) 21(-20,0) 22(-20,2) 23(-22,0) 24(-22,2)
  silkscreen extent -23.95,-2.47 1.95,3.5, body extent -23.95,-1.5 1.95,3.5, height 6.5
CAP_0603 [mm]
  rect 0.85x0.95 smd: 1(0.025,0) 2(1.575,0)
  silkscreen extent -0.58,-0.65 2.17,0.65, body extent 0.02,-0.43 1.63,0.44, height 0.8
CAP_0805 [mm]
  rect 1.27x1.27 smd: 1(0,0) 2(2,0)
  silkscreen extent -0.85,-0.85 2.85,0.85, body extent 0,-0.63 2,0.62, height 1
CAP_1206 [mm]
  rect 1.6x1.8 smd: 1(0,0) 2(2.8,0)
  silkscreen extent -1.02,-1.12 3.83,1.12, body extent -0.25,-0.77 2.95,0.83, height 0.94
CAP_A [mm]
  rect 2x1.2 smd: 1(0,0) 2(2.8,0)
  silkscreen extent -2.15,-0.82 4.03,0.82, body extent -0.33,-0.8 3.13,0.8, height 1.65
CAP_C [mm]
  rect 2.6x2.2 smd: 1(0,0) 2(5,0)
  silkscreen extent -2.4,-1.58 6.53,1.6, body extent -0.5,-1.6 5.5,1.6, height 2.5
DS1092-12-N8S [mm]
  rect 3.9x2.4 smd: 1(0,0) 2(16,0)
  round 1.2 hole 1.2: 1(4,0)
  round 1.5 hole 1.5: 1(11.5,0)
  silkscreen extent 0,-7.37 19.15,7.37, body extent -1.4,-7.37 17.4,7.37, height 4.23
HCNR200 [mm]
  rect 2.3x1.3 smd: 1(0,0) 2(0.05,-2.55) 3(0,-5.1) 4(0,-7.65) 5(11.275,-7.65) 6(11.275,-5.1) 7(11.325,-2.55) 8(11.275,0)
  silkscreen extent -0.15,-9.48 9.72,1.83, body extent -0.08,-9.47 11.33,1.83, height 5.2
IND_0805 [mm]
  rect 1.27x1.27 smd: 1(0,0) 2(2,0)
  silkscreen extent -0.85,-0.85 2.85,0.85, body extent 0,-0.62 2,0.62, height 0.85
LED_0805 [mm]
  rect 1.27x1.27 smd: 1(0,0) 2(2,0)
  silkscreen extent -0.85,-0.85 3.22,0.85, body extent -0.03,-0.46 2.03,0.45, height 0.85
LPJD0012BENL [mm]
  rect 1.4x1.4 hole 0.9: 1(0,0)
  round 1.4 hole 0.9: 2(1.27,2.54) 3(2.54,0) 4(3.81,2.54) 5(5.08,0) 6(6.35,2.54) 7(7.62,0) 8(8.89,2.54)
  round 1.6 hole 1.02: 9(-1.907,-10.46) 10(0.633,-10.46) 11(8.223,-10.46) 12(10.763,-10.46)
  round 2.1 hole 1.6: 13(-3.475,-2.46) 14(12.365,-2.46)
  round 0 hole 3.25 unplated: ""(-1.27,-6.35) ""(10.16,-6.35)
  silkscreen extent -3.57,-13.08 12.42,3.62, body extent -3.57,-13.08 12.42,3.63, height 17.4
LQFP-48 [mm]
  rect 1.8x0.3 smd: 1(0,0) 2(0,-0.5) 3(0,-1) 4(0,-1.5) 5(0,-2) 6(0,-2.5) 7(0,-3) 8(0,-3.5) 9(0,-4) 10(0,-4.5) 11(0,-5) 12(0,-5.5) 25(8.1,-5.5) 26(8.1,-5) 27(8.1,-4.5) 28(8.1,-4) 29(8.1,-3.5) 30(8.1,-3) 31(8.1,-2.5) 32(8.1,-2) 33(8.1,-1.5) 34(8.1,-1) 35(8.1,-0.5) 36(8.1,0)
  rect 0.3x1.8 smd: 13(1.3,-6.8) 14(1.8,-6.8) 15(2.3,-6.8) 16(2.8,-6.8) 17(3.3,-6.8) 18(3.8,-6.8) 19(4.3,-6.8) 20(4.8,-6.8) 21(5.3,-6.8) 22(5.8,-6.8) 23(6.3,-6.8) 24(6.8,-6.8) 37(6.8,1.3) 38(6.3,1.3) 39(5.8,1.3) 40(5.3,1.3) 41(4.8,1.3) 42(4.3,1.3) 43(3.8,1.3) 44(3.3,1.3) 45(2.8,1.3) 46(2.3,1.3) 47(1.8,1.3) 48(1.3,1.3)
  silkscreen extent -0.13,-5.6 6.9,0.92, body extent -0.45,-7.25 8.55,1.75, height 1.6
LQFP-100 [mm]
  rect 1.55x0.3 smd: 1(0,-0.025) 2(0,-0.525) 3(0,-1.025) 4(0,-1.525) 5(0,-2.025) 6(0,-2.525) 7(0,-3.025) 8(0,-3.525) 9(0,-4.025) 10(0,-4.525) 11(0,-5.025) 12(0,-5.525) 13(0,-6.025) 14(0,-6.525) 15(0,-7.025) 16(0,-7.525) 17(0,-8.025) 18(0,-8.525) 19(0,-9.025) 20(0,-9.525) 21(0,-10.025) 22(0,-10.525) 23(0,-11.025) 24(0,-11.525) 25(0,-12.025) 51(15.05,-12.025) 52(15.05,-11.525) 53(15.05,-11.025) 54(15.05,-10.525) 55(15.05,-10.025) 56(15.05,-9.525) 57(15.05,-9.025) 58(15.05,-8.525) 59(15.05,-8.025) 60(15.05,-7.525) 61(15.05,-7.025) 62(15.05,-6.525) 63(15.05,-6.025) 64(15.05,-5.525) 65(15.05,-5.025) 66(15.05,-4.525) 67(15.05,-4.025) 68(15.05,-3.525) 69(15.05,-3.025) 70(15.05,-2.525) 71(15.05,-2.025) 72(15.05,-1.525) 73(15.05,-1.025) 74(15.05,-0.525) 75(15.05,-0.025)
  rect 0.3x1.55 smd: 26(1.525,-13.55) 27(2.025,-13.55) 28(2.525,-13.55) 29(3.025,-13.55) 30(3.525,-13.55) 31(4.025,-13.55) 32(4.525,-13.55) 33(5.025,-13.55) 34(5.525,-13.55) 35(6.025,-13.55) 36(6.525,-13.55) 37(7.025,-13.55) 38(7.525,-13.55) 39(8.025,-13.55) 40(8.525,-13.55) 41(9.025,-13.55) 42(9.525,-13.55) 43(10.025,-13.55) 44(10.525,-13.55) 45(11.025,-13.55) 46(11.525,-13.55) 47(12.025,-13.55) 48(12.525,-13.55) 49(13.025,-13.55) 50(13.525,-13.55) 76(13.525,1.5) 77(13.025,1.5) 78(12.525,1.5) 79(12.025,1.5) 80(11.525,1.5) 81(11.025,1.5) 82(10.525,1.5) 83(10.025,1.5) 84(9.525,1.5) 85(9.025,1.5) 86(8.525,1.5) 87(8.025,1.5) 88(7.525,1.5) 89(7.025,1.5) 90(6.525,1.5) 91(6.025,1.5) 92(5.525,1.5) 93(5.025,1.5) 94(4.525,1.5) 95(4.025,1.5) 96(3.525,1.5) 97(3.025,1.5) 98(2.525,1.5) 99(2.025,1.5) 100(1.525,1.5)
  silkscreen extent -0.12,-12.37 13.87,0.78, body extent -0.48,-14.03 15.53,1.98, height 1.5
MSOP-8 [mm]
  rect 1.6x0.4 smd: 1(0,0) 2(0,-0.65) 3(0,-1.3) 4(0,-1.95) 5(4.9,-1.95) 6(4.9,-1.3) 7(4.9,-0.65) 8(4.9,0)
  silkscreen extent -0.1,-2.4 3.78,0.67, body extent -0.02,-2.52 4.92,0.58, height 1.1
MSOP-10 [mm]
  rect 1.4x0.4 smd: 1(-0.025,0) 2(-0.025,-0.5) 3(-0.025,-1) 4(-0.025,-1.5) 5(-0.025,-2) 6(4.575,-2) 7(4.575,-1.5) 8(4.575,-1) 9(4.575,-0.5) 10(4.575,0)
  silkscreen extent -0.1,-2.5 3.62,0.67, body extent -0.21,-2.5 4.81,0.5, height 1.05
NX2520SA [mm]
  rect 1.2x1 smd: 1(0,0) 2(1.7,0) 3(1.7,1.3) 4(0,1.3)
  silkscreen extent -0.8,-0.7 2.5,2, body extent -0.4,-0.35 2.1,1.65, height 0.65
NX3215SA [mm]
  rect 1x1.8 smd: 1(0,0) 2(2.5,0)
  silkscreen extent -0.7,-1.1 3.2,1.1, body extent -0.35,-0.75 2.85,0.75, height 0.8
PLD-6 [mm]
  rect 1.6x1.6 hole 1: 1(0,0)
  round 1.6 hole 1: 2(0,2.54) 3(2.54,0) 4(2.54,2.54) 5(5.08,0) 6(5.08,2.54)
  silkscreen extent -1.27,-2.12 6.27,3.81, body extent -1.3,-1.2 6.32,3.8, height 8.5
RES_0603 [mm]
  rect 0.85x0.95 smd: 1(0.025,0) 2(1.575,0)
  silkscreen extent -0.58,-0.65 2.17,0.65, body extent -0.05,-0.48 1.65,0.48, height 0.6
RES_0805 [mm]
  rect 1.27x1.27 smd: 1(0,0) 2(2,0)
  silkscreen extent -0.85,-0.85 2.85,0.85, body extent 0,-0.62 2,0.62, height 0.6
RES_1210 [mm]
  rect 1.6x2.8 smd: 1(-0.025,0.025) 2(2.775,0.025)
  silkscreen extent -1.02,-1.58 3.77,1.63, body extent -0.15,-1.28 2.95,1.33, height 0.57
SOD-323 [mm]
  rect 0.9x0.4 smd: 1(-0.025,0) 2(2.475,0)
  silkscreen extent -1.02,-0.7 3.1,0.72, body extent -0.05,-0.68 2.55,0.67, height 1.1
SOIC-8 [mm]
  rect 1.8x0.6 smd: 1(0,0) 2(0,-1.25) 3(0,-2.55) 4(0,-3.8) 5(6,-3.8) 6(6,-2.55) 7(6,-1.25) 8(6,0)
  silkscreen extent -0.12,-4.38 4.8,0.87, body extent -0.13,-4.37 6.08,0.63, height 1.75
"SOIC-8 EPAD" [mm]
  rect 1.8x0.6 smd: 1(0,0) 2(0,-1.25) 3(0,-2.55) 4(0,-3.8) 5(6,-3.8) 6(6,-2.55) 7(6,-1.25) 8(6,0)
  rect 2.5x3 smd: EPAD(3,-1.9)
  silkscreen extent -0.12,-4.38 4.8,0.87, body extent -0.13,-4.37 6.08,0.63, height 1.75
SOIC-16W [mm]
  rect 2.3x0.6 smd: 1(0,0) 2(0,-1.27) 3(0,-2.54) 4(0,-3.81) 5(0,-5.08) 6(0,-6.35) 7(0,-7.62) 8(0,-8.89) 9(9.6,-8.89) 10(9.6,-7.62) 11(9.6,-6.35) 12(9.6,-5.08) 13(9.6,-3.81) 14(9.6,-2.54) 15(9.6,-1.27) 16(9.6,0)
  silkscreen extent -0.15,-9.9 8.03,1, body extent -0.51,-9.7 10.11,0.8, height 2.62
SOP-16 [mm]
  rect 1.14x0.91 smd: 1(0,0) 2(0,-1.27) 3(0,-2.54) 4(0,-3.81) 5(0,-5.08) 6(0,-6.35) 7(0,-7.62) 8(0,-8.89) 9(6.22,-8.89) 10(6.22,-7.62) 11(6.22,-6.35) 12(6.22,-5.08) 13(6.22,-3.81) 14(6.22,-2.54) 15(6.22,-1.27) 16(6.22,0)
  silkscreen extent -0.1,-9.43 5.3,1, body extent -0.07,-9.44 6.17,0.54, height 1.58
SOT-23-3 [mm]
  rect 1.2x0.55 smd: 1(0,0) 2(0,-1.9) 3(2.15,-0.95)
  silkscreen extent -0.27,-2.5 2,0.65, body extent -0.15,-2.45 2.35,0.55, height 1
SOT-23-5 [mm]
  rect 1.2x0.55 smd: 1(0,0) 2(0,-0.95) 3(0,-1.9) 4(2.15,-1.9) 5(2.15,0)
  silkscreen extent -0.27,-2.5 1.97,0.65, body extent -0.15,-2.45 2.35,0.55, height 1.1
SOT-23-6 [mm]
  rect 1.2x0.55 smd: 1(0,0) 2(0,-0.95) 3(0,-1.9) 4(2.15,-1.9) 5(2.15,-0.95) 6(2.15,0)
  silkscreen extent -0.27,-2.5 1.97,0.65, body extent -0.3,-2.4 2.5,0.5, height 1.18
SOT-89 [mm]
  rect 0.57x1.4 smd: 1(0,0) 3(3,0)
  rect 0.65x1.4 smd: 2(1.5,0)
  Top Layer region: 1.825,0.7 2.5,1.375 2.5,3.825 0.5,3.825 0.5,1.375 1.175,0.7 1.175,-0.7 1.825,-0.7
  Top Layer lines w0.2: 1.5,-0.075 1.5,0
  silkscreen extent -0.82,-0.07 3.75,3, body extent -0.75,-0.43 3.75,3.57, height 1.5
"TME (SIP-4)" [mm]
  rect 1.4x1.4 hole 0.8: 1(0,0)
  round 1.4 hole 0.8: 2(2.54,0) 3(5.08,0) 4(7.62,0)
  silkscreen extent -1.9,-1.7 9.6,5.4, body extent -1.9,-1.7 9.5,4.3, height 10.2
"TMR3 (SIP-8)" [mm]
  rect 1.3x1.3 hole 0.7: 1(0,0)
  round 1.3 hole 0.7: 2(2.54,0) 3(5.08,0) 5(10.16,0) 6(12.7,0) 7(15.24,0) 8(17.78,0)
  silkscreen extent -2,-5.58 19.8,3.5, body extent -2,-5.6 19.8,3.5, height 11.2
"TMR4 (SIP-8)" [mm]
  rect 1.3x1.3 hole 0.7: 1(0,0)
  round 1.3 hole 0.7: 2(2.54,0) 3(5.08,0) 5(10.16,0) 6(12.7,0) 7(15.24,0) 8(17.78,0)
  silkscreen extent -2,-6.7 19.9,2.5, body extent -2,-6.75 19.8,2.55, height 11.4
TO-252 [mm]
  rect 1.5x2.8 smd: 1(0,0) 3(4.575,0)
  rect 6.3x6.1 smd: 2(2.3,6.2)
  silkscreen extent -1.17,-2.12 5.77,8.93, body extent -0.97,-0.94 5.57,9, height 2.44

## Part data
C1 C2 C23 C24 C38 C41 C81 C85 C93A10 C93A12: library part Capacitor_Polar
  C1 C23 C38 C81 C85: Model="TECAP, 10 мкФ, 35 В, тип C, 10%"
  C2 C24 C41 C93A10 C93A12: Model="TECAP, 10 мкФ, 10 В, тип A, 10%"
C3 C4 C5 C6 C7 C8 C9 C10 C11 C12 C13 C14 C15 C16 C17 C19 C21 C22 C25 C26 C27 C28 C29 C30 C31 C32 C33 C34 C35 C36 C37 C39 C40 C42 C43 C44 C45 C46 C47 C48 C49 C50 C51 C52 C54 C55 C56 C57 C59 C61 C62 C63 C64 C65 C66 C67 C68 C69 C70 C71 C72 C73 C74 C75 C76 C77 C78 C79 C80 C82 C83 C84 C86 C87 C88 C89 C90A10 C90A12 C91A10 C91A12 C92A10 C92A12 C94A10 C94A12 C95A10 C95A12 C96A10 C96A12 C97: library part Capacitor, Manufacturer=Murata
  C3 C4 C6 C7 C8 C9 C10 C11 C13 C15 C16 C17 C22 C25 C26 C27 C28 C29 C31 C32 C34 C35 C36 C37 C39 C40 C43 C47 C48 C49 C51 C52 C54 C55 C56 C57 C59 C61 C62 C63 C64 C65 C66 C67 C68 C69 C70 C71 C72 C74 C75 C76 C77 C78 C79 C80 C83 C84 C87 C88 C89 C90A10 C90A12 C92A10 C92A12 C95A10 C95A12 C96A10 C96A12 C97: Model=GRM188R71H104KA93D
  C5 C12 C14: Model=GRM188R61H225KE11D
  C19 C21: Model=GRM1885C1H180FA01D
  C30 C44 C45 C46 C50 C86: Model=GRM188R61H105KAALD
  C33 C73: Model=GRM1885C1H101JA01D
  C42 C82: Model=GRM219R71H334KA88D
  C91A10 C91A12 C94A10 C94A12: Model=GRM1885C1H100JA01D
C18 C20 C53 C58 C60: library part Capacitor, Manufacturer=Yageo
  C18 C20 C58 C60: Model=CC0603CRNPO9BN8R0
  C53: Model=CC1206KKX7RDBB102
DA1: library part TMR3, Manufacturer="Traco Power", Model="TMR 3-2411"
DA2: library part KFXXBD-TR, Manufacturer=STMicroelectronics, Model=KF33BD-TR
DA3 DA7: library part TME, Manufacturer="Traco Power", Model="TME 2405S"
DA4: library part SN74LVC1G3157, Manufacturer="Texas Instruments", Model=SN74LVC1G3157DBV
DA5 DA6 DA10 DA11: library part LMC7101, Manufacturer="Texas Instruments", Model=LMC7101BIM5
DA8: library part LD2981ABU50TR, Manufacturer=STMicroelectronics, Model=L78L12ABUTR
DA9: library part TPD4S009, Manufacturer="Texas Instruments", Model=TPD4S009DBVR
DA12: library part TMR4, Manufacturer="Traco Power", Model="TMR 4-2415"
DA13: library part L78M, Manufacturer=STMicroelectronics, Model=L78M05CDT-TR
DA14: library part LM7301IM5, Manufacturer="Texas Instruments", Model=LM7301IM5X/NOPB
DA15A10 DA15A12 DD4 DD11: Manufacturer="Analog Devices"
  DA15A10 DA15A12: Model=ADA4817-1ARDZ
  DD4: Model=ADM2483BRW
  DD11: Model=ADM101EARM
DA16A10 DA16A12: library part AD8611, Manufacturer="Analog Devices", Model=AD8611ARM-REEL
DD1: library part STM32F405VG, Manufacturer=STMicroelectronics, Model=STM32F405VGT6
DD2: library part W25Q, Manufacturer=Winbond, Model=W25Q16JVSNIQ
DD3: library part ADUM1401, Manufacturer="Analog Devices", Model=ADUM1401CRW
DD5 DD13: library part ADUM1400, Manufacturer="Analog Devices", Model=ADUM1400CRW
DD6 DD7 DD8 DD9: library part SN74LVC1G17, Manufacturer="Texas Instruments", Model=SN74LVC1G17DBV
DD10: library part W5100S, Manufacturer=Wiznet, Model=W5100S-L
DD12: library part ADUM1201, Manufacturer="Analog Devices", Model=ADUM1201CR
DD14: library part ADUM1100, Manufacturer="Analog Devices", Model=ADUM1100BR
GB1: library part Accumulator, Manufacturer=Connfly, Model=DS1092-12-N8S
L1 L2 L3 L4 L5 L6 L7: library part Inductor, Manufacturer=Murata, Model=BLM21PG221SN1D
R1 R2 R3 R4 R5 R6 R7 R8 R9 R10 R11 R12 R13 R14 R15 R16 R17 R18 R19 R20 R21 R22 R23 R24 R25 R26 R27 R28 R29 R30 R31 R32 R33 R34 R35 R36 R37 R38 R39 R40 R41 R42 R43 R44 R45 R46 R47 R48 R49 R50 R51 R52 R53 R54 R55 R56 R57 R58 R59 R60 R61 R62 R63 R64 R65 R66 R67 R68 R69 R70 R71 R72 R73 R74 R75 R76 R77 R78 R79 R80 R81 R82 R83 R84 R85 R86 R87 R88 R89 R90 R91A10 R91A12 R92A10 R92A12 R93A10 R93A12 R94A10 R94A12 R95A10 R95A12 R97A10 R97A12 R98A10 R98A12 R99 R100: library part Resistor, Manufacturer=Yageo
  R1 R2 R83 R85: Model=RC0805FR-070RL
  R3 R4 R7 R10 R12 R14 R15 R17 R18 R19 R20 R24 R25 R26 R32 R50 R51 R52 R53 R54 R55 R57 R58 R59 R60 R61 R62 R63 R68 R69 R71 R73 R74 R75 R77 R82 R84 R86 R87 R89 R90 R93A10 R93A12 R95A10 R95A12 R97A10 R97A12 R98A10 R98A12 R99 R100: Model=RC0603FR-0710KL
  R5 R6 R9 R13 R27 R28 R29 R30 R33 R34 R35 R78 R79 R80 R81: Model=RC0603FR-07200RL
  R8: Model=RC0805FR-07120RL
  R11 R48: Model=RC0603FR-0712KL
  R16: Model=RC1210FR-0710RL
  R21 R22 R23 R31 R42 R45: Model=RC0603FR-071KL
  R36 R37 R38 R39: Model=RC0603FR-0749R9L
  R40 R41 R43 R44: Model=RC0603FR-073R3L
  R46: Model=RC0603FR-07300RL
  R47: Model=RC0603FR-071ML
  R49: Model=RC0603JR-070RL
  R56: Model=RC0603FR-0720KL
  R64 R65 R66 R67: Model=RC0603FR-07390RL
  R70: Model=RC0603FR-07330RL
  R72 R76: Model=RC0603FR-07150KL
  R88: Model=RC0603FR-076K04L
  R91A10 R91A12 R92A10 R92A12: Model=RC0805FR-071ML
  R94A10 R94A12: Model=RC0603FR-075K1L
R96A10 R96A12: library part Resistor_Variable, Manufacturer=Bourns, Model=3224W-1-204E
U1 U2 U3 U4 U5: library part TLP291, Manufacturer=Toshiba, Model=TLP291(GB-TP,SE
U6 U7 U8 U9 U11: Manufacturer=Toshiba
  U6 U7 U8: Model=TLP127
  U9 U11: Model=TLP281-4
U10: library part HCNR200, Manufacturer=Avago, Model=HCNR-200-500E
VD1 VD2: library part LED, Manufacturer=Kingbright
  VD1: Model=KP-2012MGC
  VD2: Model=KP-2012EC
VD3 VD4 VD5 VD6: library part Diode_Zener, Manufacturer=Nexperia, Model=BZX384-C5V1
VT1: library part "MOSFET N-channel", Manufacturer=UMW, Model=AO3400A
XP1 XP4 XP5 XP8 XP9 XP11: library part Connector-8, Manufacturer=JST, Model=B8B-PHDSS
XP2 XP6 XP10: library part Connector-2, Manufacturer=JST
  XP2: Model=B2P-VH
  XP6 XP10: Model=B2B-EH-A
XP3: library part Connector-6, Manufacturer=Connfly, Model=PLD-6
XP7: library part Connector-12, Manufacturer=JST, Model=B12B-PHDSS
XP12: library part Connector-24, Manufacturer=JST, Model=B24B-PHDSS
XS1: Manufacturer=LINK-PP, Model=LPJD0012BENL
ZQ1: library part Quartz_Resonator_4-pin, Manufacturer=NDK, Model=NX2520SA-16MHZ-STD-CSW-5
ZQ2: library part Quartz_Resonator, Manufacturer=NDK, Model="NX3215SA- 32.768K-STD-MUA-8"
ZQ3: library part Quartz_Resonator_4-pin, Manufacturer=TXC, Model=7M-25.000MAAJ-T

## Free pads (board coordinates)
  round 6 hole 3.2: ""(5,5) ""(5,95) ""(125,5) ""(125,95)

## Via types
v1: diameter 0.6, hole 0.3, Top Layer to Bottom Layer, tented both sides, 832 vias
v2: diameter 0.6, hole 0.3, Top Layer to Bottom Layer, 25 vias

## Nets (pads, with @x,y where several pads share a name; then routed paths per layer and width w, separated by ;. In a path a pad name is that pad's centre, name@x,y a point inside that pad or via, vN(x,y) a via of type N, cw(c..) or ccw(c..) an arc to the next point about the centre after c; other vN are vias at no path point)
1V2A: C62.1 DD10.4 L4.2 | length 5.7
  Top Layer w0.3: DD10.4@103.4,38.5 v1(105.7,38.5)
  Bottom Layer w0.5: C62.1@104.05,36.6 104.05,38.25 L4.2@104.3,38.5 v1(105.7,38.5)
1V2D: C61.1 C65.1 C67.1 C68.1 DD10.13 DD10.22 DD10.31 DD10.45 L3.2 L4.1 | length 41.2
  Top Layer w0.3: v1(93.3,39.7) 93.381,39.7 93.581,39.5 DD10.31@95.3,39.5 ; DD10.22@97.6,43.8 97.6,44.65 v1(97.6,45.4) ; v1(99.9,33.8) 100.6,34.5 DD10.45@100.6,35.7 ; DD10.13@102.1,43.8 102.1,44.4 v1(103,44.4)
  Bottom Layer w0.5: v1(93.3,39.7) 93.327,39.7 93.452,39.575 94.195,39.575 94.37,39.4 C68.1@94.37,39.35 ; v1(97.6,45.4) 97.6,44.56 C65.1@97.45,44.41 ; v1(99.9,33.8) 99.9,34.57 C67.1@99.95,34.62 96.48,34.62 94.37,36.73 C68.1@94.37,39.35 ; L4.1@102.3,38.5 102.3,40.5 102.5,40.7 103.4,40.7 L3.2@103.5,40.8 103.953,41.253 104.353,41.253 104.9,41.8 104.9,43.6 104.09,44.41 103,44.41 102.995,44.405 98.955,44.405 C61.1@98.95,44.41 C65.1@97.45,44.41 ; C68.1@94.37,39.35 94.37,42.27 96.51,44.41 C65.1@97.45,44.41
1V2O: C57.1 DD10.14 L3.1 | length 4.7
  Top Layer w0.3: v1(101.6,42) 101.6,42.75 DD10.14@101.6,43.8
  Bottom Layer w0.5: v1(101.6,42) 101.6,42.014 101.9,42.314 C57.1@101.9,43.1 103.2,43.1 L3.1@103.5,42.8